# Altium PCB HHO_DRIVE_V1.PcbDoc
Units mm, origin at the board's own origin, x right, y up, seen from the top; angles counter-clockwise.
Board outline 109.5 x 99 mm, 2 copper layers (Top Layer, Bottom Layer); 45 components, 38 nets, 156 pads, 12 vias.
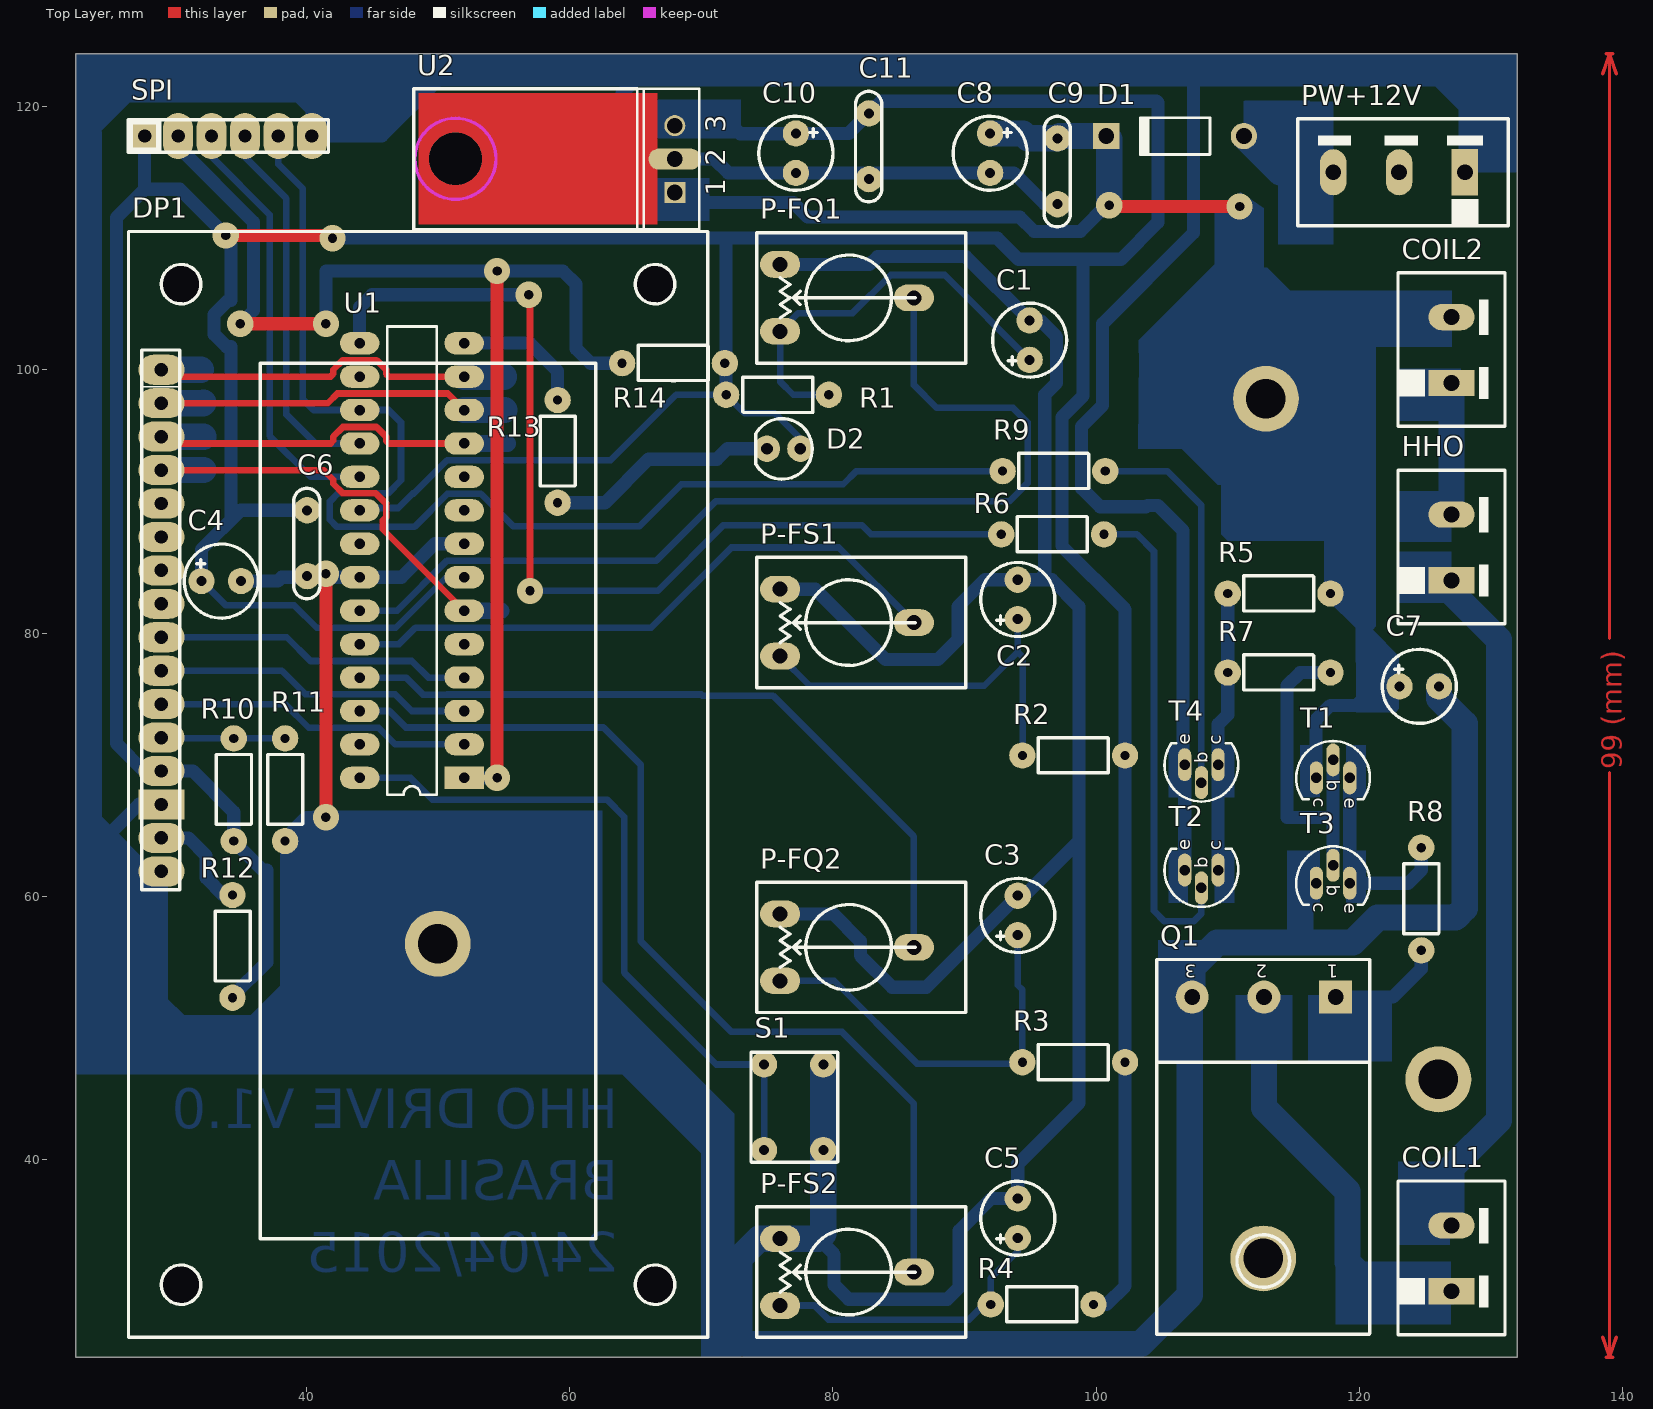
[diagram p0: Top Layer view]
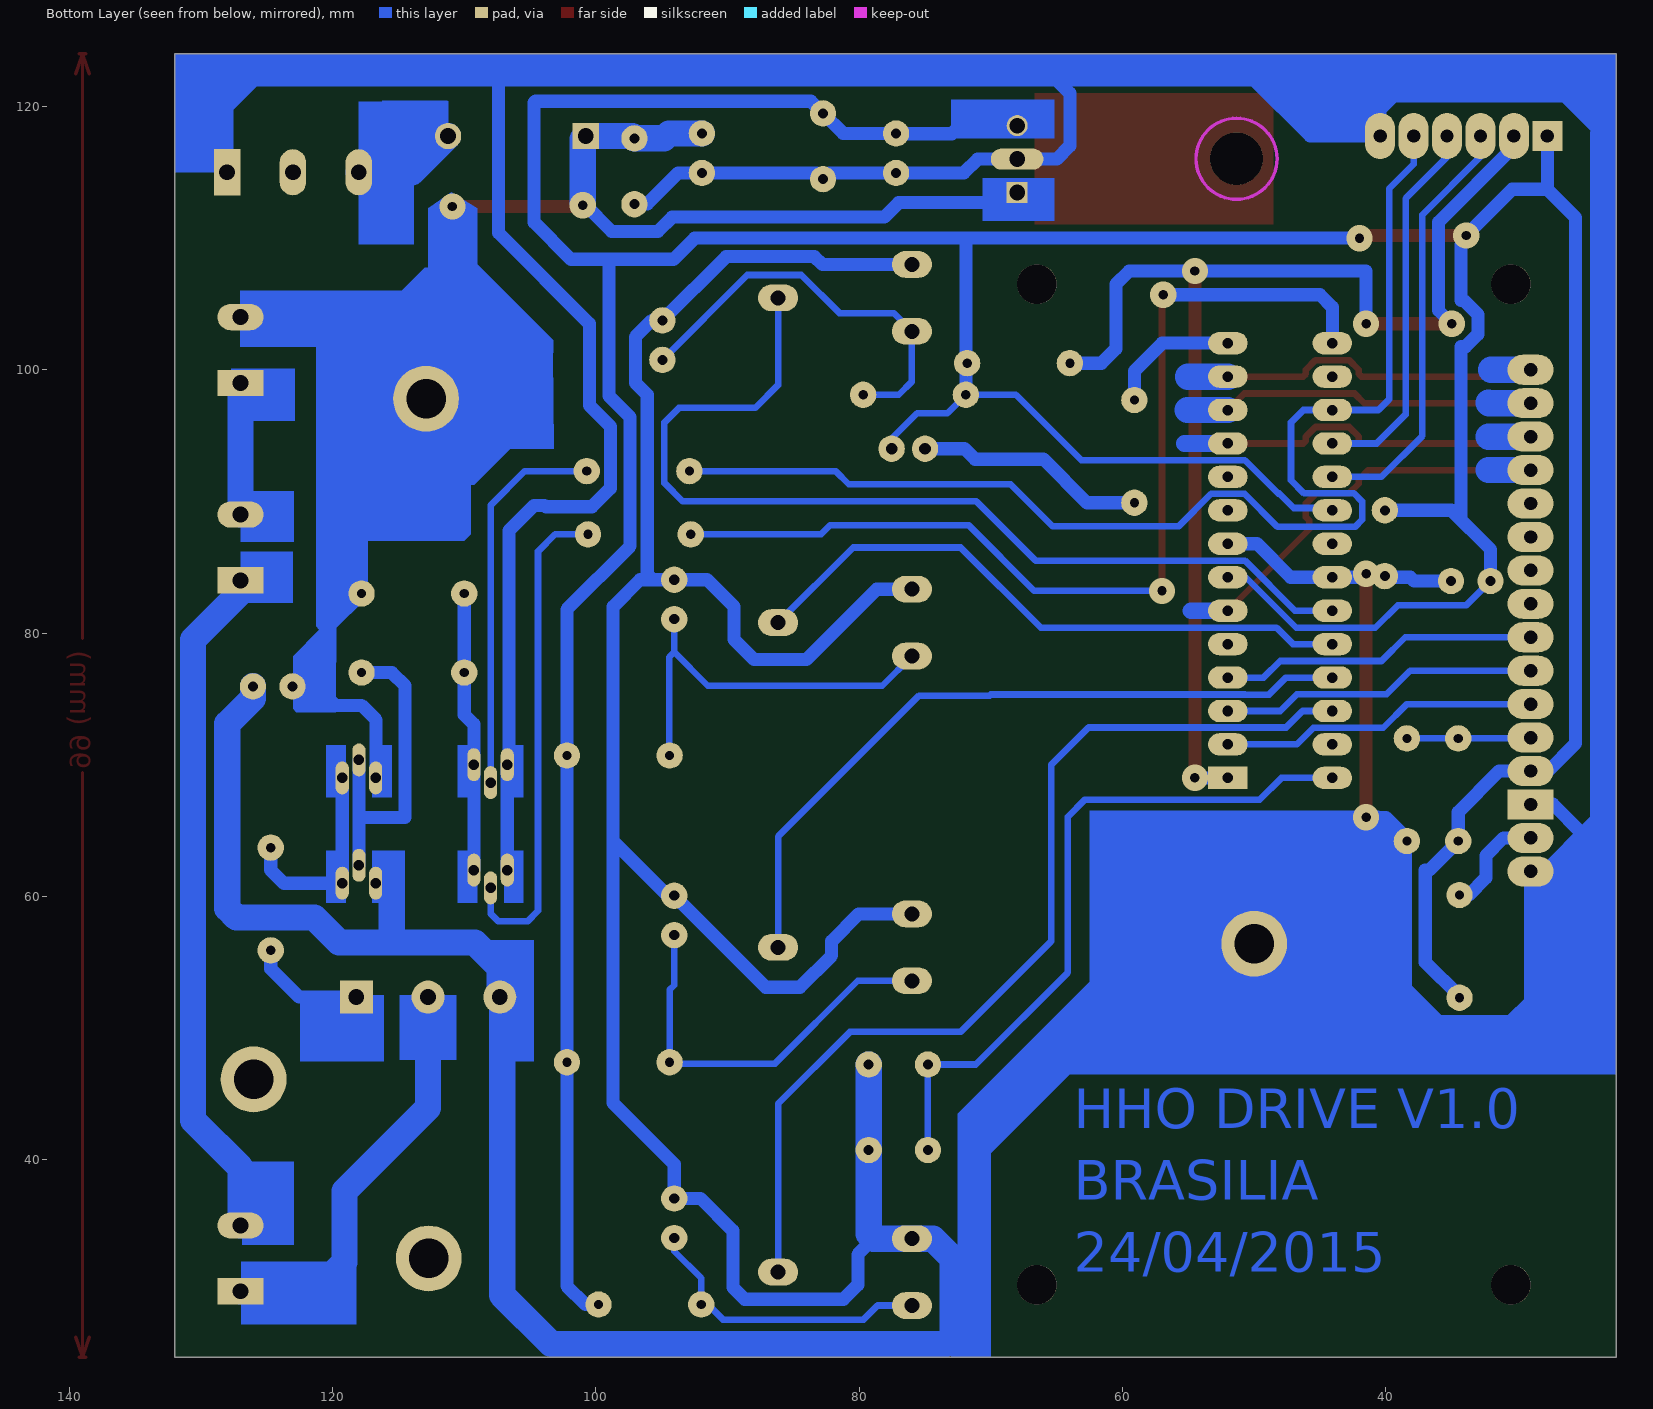
[diagram p1: Bottom Layer view, seen from below]
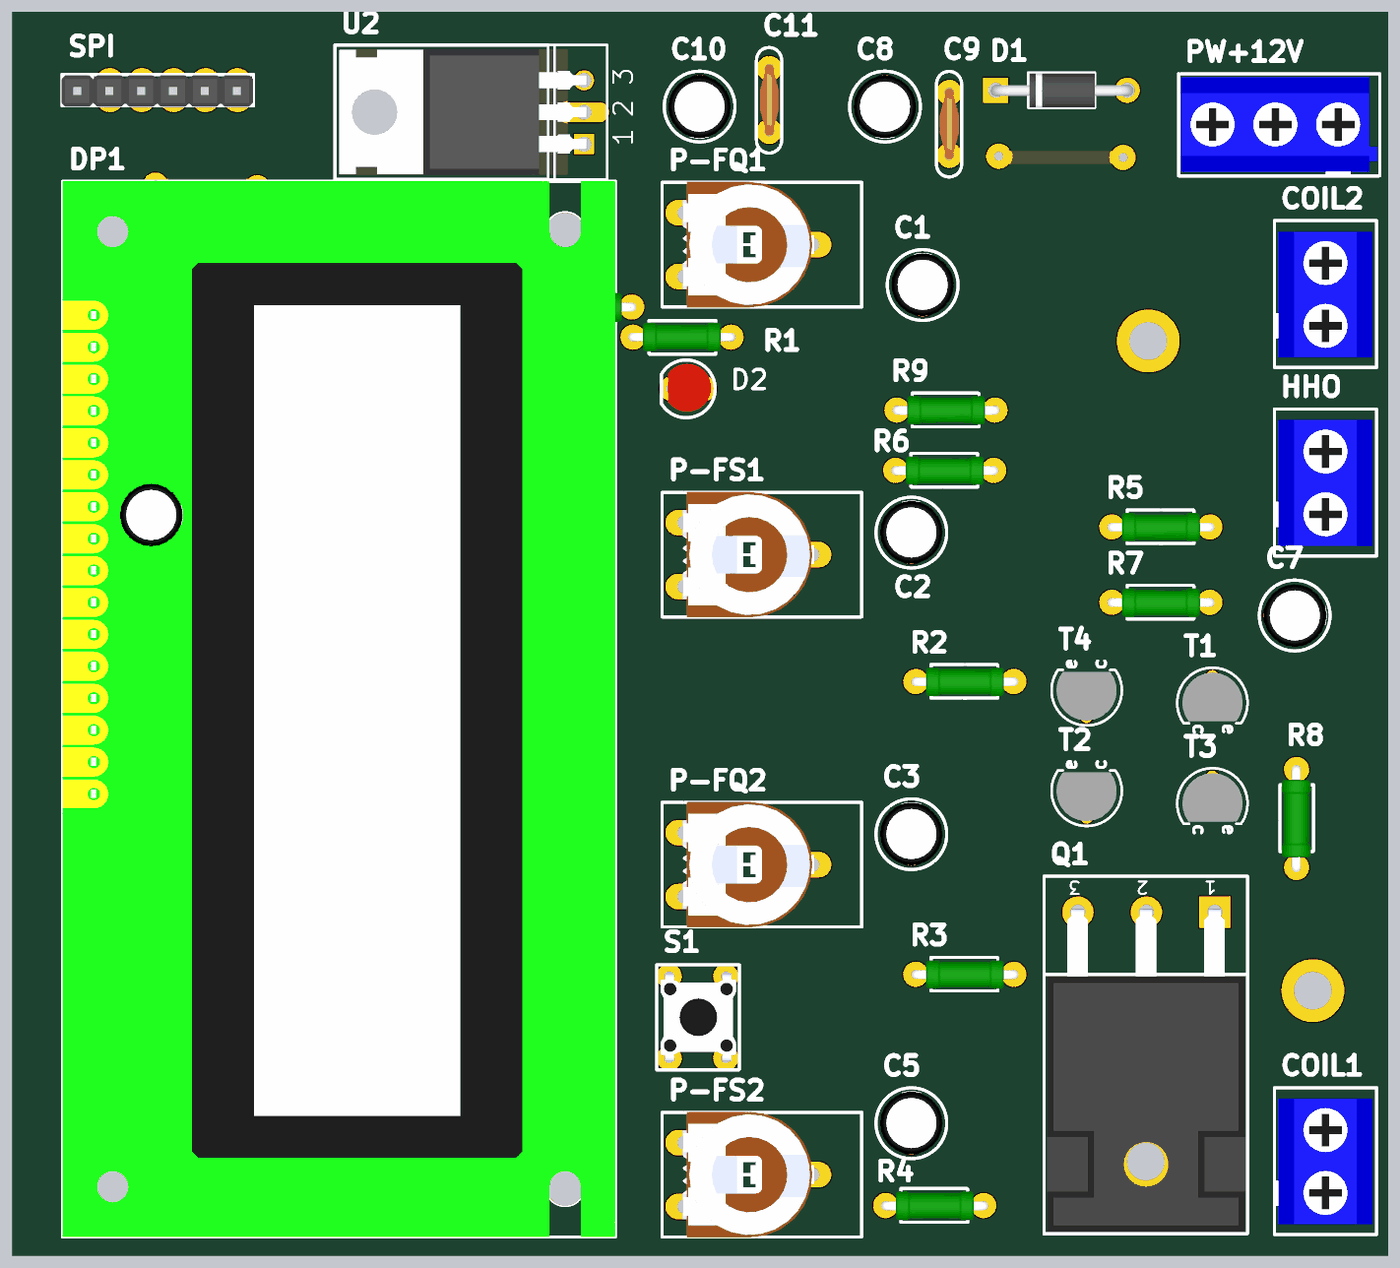
[diagram p2: 3D render of the assembled board from above, using the file's embedded part models]

## Layer stack, top to bottom
Top Solder: solder mask 0.0102, Solder Resist, Dk 3.5
Top Layer: signal copper 0.0356
Dielectric 1: dielectric 0.32, FR-4, Dk 4.8
Bottom Layer: signal copper 0.0356
Bottom Solder: solder mask 0.0102, Solder Resist, Dk 3.5

## Board outline
22.5,25 22.5,124 132,124 132,25

## Design rules (kind name [scope] priority, off if disabled: settings)
Clearance [All] p1: gap=0.254
PolygonConnect [All] p1: connectstyle=Relief reliefconductorwidth=0.254 reliefentries=4 polygonreliefangle="90 Angle" airgapwidth=0.254
RoomDefinition HHO_DRIVE_V1 [InComponentClass('HHO_DRIVE_V1')] p1: confinementstyle=ConfineIn formatcopy=TRUE lockcomponents=FALSE outline 19.75,25.5 21.75,25.5 21.75,123.5 19.75,123.5
RoutingVias [All] p1: holewidth=0.711 width=1.27 viastyle="Through Hole" minholewidth=0.711 minwidth=1.27 maxholewidth=0.711 maxwidth=1.27
SolderMaskExpansion [All] p1: expansion=0.102
UnpouredPolygon [All] p1: allowunpoured=FALSE
Width Width_POWER [(InNet('+12V') AND InNet('VCC') AND InNet('GND'))] p1: maxlimit=2 minlimit=0.25 preferedwidth=0.5
Width [All] p2: maxlimit=2 minlimit=0.25 preferedwidth=0.5
29 further rules are at their usual default settings.

## Components (designator, comment, footprint, x,y, rotation, side; value= is the part's Value field where it differs from the comment)
C1 "Cap. Elet." "CAP ELE RAD 11mm H" 96.9,102.7 r90 top
C2 "Cap. Elet." "CAP ELE RAD 11mm H" 96,83 r90 top
C3 "Cap. Elet." "CAP ELE RAD 11mm H" 96,59 r90 top
C4 "Cap. Elet." "CAP ELE RAD 11mm H" 34,82 r0 top
C5 "Cap. Elet." "CAP ELE RAD 11mm H" 96,36 r90 top
C6 "Disco" "CAP CER DISK 5MM" 40,84 r90 top
C7 "Cap. Elet." "CAP ELE RAD 11mm H" 125,74 r0 top
C8 "Cap. Elet." "CAP ELE RAD 11mm H" 90,116 r270 top
C9 "Disco" "CAP CER DISK 5MM" 97,112.25 r90 top
C10 "Cap. Elet." "CAP ELE RAD 11mm H" 75.25,116 r270 top
C11 "Disco" "CAP CER DISK 5MM" 82.675,114.15 r90 top
COIL1 "Male Connector 2 pins" BR102A 127,30 r180 top
COIL2 "Male Connector 2 pins" BR102A 127,99 r180 top
D1 "1N4001" DO-41 106,117.75 r180 top
D2 "LED-CPU" "LED Red 3mm" 75,94 r0 top
DP1 "DIPS 44780 16X02" "Display 44780 16x02 com conector" 29,100 r0 top
HHO "Male Connector 2 pins" BR102A 127,84 r180 top
P-FQ1 "POT" "POT 200MIL/400MIL" 76,108 r270 top
P-FQ2 "POT" "POT 200MIL/400MIL" 76,58.667 r270 top
P-FS1 "POT" "POT 200MIL/400MIL" 76,83.333 r270 top
P-FS2 "POT" "POT 200MIL/400MIL" 76,34 r270 top
PW+12V "Male Connector 3 pins" BR103A 128.016,115 r270 top
Q1 "T-HEXFET N" "TO218 - DEITADO" 115,52 r180 top
R1 "Resistor Generic" "RES 300 CR25" 79.7,98.1 r180 top
R2 "Resistor Generic" "RES 300 CR25" 94.4,70.7 r0 top
R3 "Resistor Generic" "RES 300 CR25" 94.4,47.4 r0 top
R4 "Resistor Generic" "RES 300 CR25" 92,29 r0 top
R5 "Resistor Generic" "RES 300 CR25" 110,83 r0 top
R6 "Resistor Generic" "RES 300 CR25" 92.8,87.5 r0 top
R7 "Resistor Generic" "RES 300 CR25" 110,77 r0 top
R8 "Resistor Generic" "RES 300 CR25" 124.7,63.7 r270 top
R9 "Resistor Generic" "RES 300 CR25" 92.9,92.3 r0 top
R10 "Resistor Generic" "RES 300 CR25" 34.5,72 r270 top
R11 "Resistor Generic" "RES 300 CR25" 38.4,72 r270 top
R12 "Resistor Generic" "RES 300 CR25" 34.4,60.1 r270 top
R13 "Resistor Generic" "RES 300 CR25" 59.1,97.7 r270 top
R14 "Resistor Generic" "RES 300 CR25" 64,100.5 r0 top
S1 "SW-PBST 4 Pins" "SW-PBST 4 Pins - SKHH 17 mm" 76.35,44.45 r0 top
SPI "BAR 6 PINS" "HEADER BAR 6 PINS" 29,119 r0 top
T1 "Transistor" "TO-92 - Large" 118,69 r270 top
T2 "Transistor" "TO-92 - Large" 108,62 r90 top
T3 "Transistor" "TO-92 - Large" 118,61 r270 top
T4 "Transistor" "TO-92 - Large" 108,70 r90 top
U1 "ATmega8-16PC" 28P3 52,69 r180 top
U2 "µA78M05CKC" "KC03 - Deitado" 68,116 r90 top

## Footprints (in the part's own frame and the unit in brackets; to place one, negate y for a bottom-side part, rotate by r counter-clockwise, add the part's x,y. Pads: shape width x height; smd on the part's side, far side on the other; paste and mask are expansions set on the pad)
28P3 [mm] "Atmel DIP 28"
  rect 3x1.7 hole 0.8: 1(0,0)
  oval 3x1.7 hole 0.8: 2(0,-2.54) 3(0,-5.08) 4(0,-7.62) 5(0,-10.16) 6(0,-12.7) 7(0,-15.24) 8(0,-17.78) 9(0,-20.32) 10(0,-22.86) 11(0,-25.4) 12(0,-27.94) 13(0,-30.48) 14(0,-33.02) 15(7.938,-33.02) 16(7.938,-30.48) 17(7.938,-27.94) 18(7.938,-25.4) 19(7.938,-22.86) 20(7.938,-20.32) 21(7.938,-17.78) 22(7.938,-15.24) 23(7.938,-12.7) 24(7.938,-10.16) 25(7.938,-7.62) 26(7.938,-5.08) 27(7.938,-2.54) 28(7.938,0)
  silkscreen extent 2.08,-34.29 5.85,1.27, body extent -0.48,-34.4 8.43,1.1, height 3.2
BR102A [mm] "MetalTex Borne 2 vias passo 5mm"
  rect 3.5x2 hole 1.2: 1(0,0)
  oval 3.5x2 hole 1.2: 2(0,-5)
  silkscreen extent -4.06,-8.37 4.06,3.3, body extent -3.75,-7.5 3.75,2.5, height 10.01
BR103A [mm] "MetalTex Borne 3 vias passo 5mm"
  rect 3.5x2 hole 1.2: 1(0,0)
  oval 3.5x2 hole 1.2: 2(0,-5) 3(0,-10)
  silkscreen extent -4.06,-12.7 4.06,3.3, body extent -3.78,-12.5 3.72,3.1, height 10.01
"CAP CER DISK 5MM" [mm] "CAP CER DISK 5MM"
  round 2 hole 0.762: 1(0.325,-0.075) 2(5.325,-0.075)
  silkscreen extent -1.4,-1.05 7,0.95, body extent -0.01,-0.82 5.67,0.67, height 6.24
"CAP ELE RAD 11mm H" [mm] "Cap Eletrolitic Radial 11mm Height"
  round 2 hole 0.762: 1(-1.95,1.95) 2(1.05,1.95)
  silkscreen extent -3.26,-0.86 2.36,4.76, body extent -2.94,-0.55 2.1,4.45, height 11.03
"Display 44780 16x02 com conector" [mil] "Display 44780 16x02 com conector"
  rect 137.8x90 hole 40: 1(0,-1300)
  oval 137.8x90 hole 40: 2(0,-1200) 3(0,-1100) 4(0,-1000) 5(0,-900) 6(0,-800) 7(0,-700) 8(0,-600) 9(0,-500) 10(0,-400) 11(0,-300) 12(0,-200) 13(0,-100) 14(0,0) 15(0,-1400) 16(0,-1500)
  silkscreen extent -98,-2894 1634,413, body extent -98,-2894 1634,413, height 737
DO-41 [mm] "Diode, Axial; Body 5.2 x 2.7 mm (LxDia. max), Lead Dia. 0.86 mm (max)"
  round 2 hole 1.2: 1(-5.23,0)
  rect 2x2 hole 1.2: 2(5.23,0)
  silkscreen extent -2.65,-1.4 2.75,1.4, body extent -5.7,-1.36 5.62,1.4, height 2.74
"HEADER BAR 6 PINS" [mil] ".100 Inch AMPMODU Header 6 Pins"
  rect 90x90 hole 40: 1(-50,-48.82)
  oval 90x137.8 hole 40: 2(50,-48.82) 3(150,-48.82) 4(250,-48.82) 5(350,-48.82) 6(450,-48.82)
  silkscreen extent -100,-98 500,0, body extent -102,-101 498,-2, height 328
"KC03 - Deitado" [mm] "TO, Thru-Hole, Vertical, Heatsink Mounted; 3 In-Line Leads; Pitch 2.54 mm"
  rect 1.6x1.6 hole 1.2: 1(-2.54,0)
  oval 1.6x4 hole 1.2: 2(0,0)
  round 1.6 hole 1.2: 3(2.54,0)
  round 4 hole 4: ""(0.025,16.662)
  Top Layer region: -4.978,1.295 5.004,1.295 5.004,19.482 -4.978,19.482
  Keep-Out Layer circle w0.254: c0.025,16.662 r3.08
  silkscreen extent -5.36,-1.85 5.35,19.84, body extent -4.99,-0.25 5.01,19.47, height 4.5
"LED Red 3mm" [mm] "LED Red 3mm"
  round 2 hole 0.889: A(2.54,0) K(0,0)
  silkscreen extent -0.85,-2.31 3.44,2.29, body extent -0.33,-1.83 3.13,1.98, height 5.2
"POT 200MIL/400MIL" [mil] "Pot 200Mil/400Mil"
  oval 80x120 hole 45: 1(0,0) 2(100,400) 3(200,0)
  silkscreen extent -95,-70 295,555, body extent -97,-5 297,407, height 226
"RES 300 CR25" [mm] "Resistor CR25 300Mil height 2.4"
  round 2 hole 0.7: 1(0,0) 2(7.8,0)
  silkscreen extent 1.22,-1.35 6.53,1.35, body extent -0.34,-1.17 8.16,1.13, height 2.29
"SW-PBST 4 Pins - SKHH 17 mm" [mm] "Tactile switch SKHH 17mm"
  round 2 hole 0.762: 1(2.93,2.78) 2(2.93,-3.72) 3(-1.57,2.78) 4(-1.57,-3.72)
  silkscreen extent -2.56,-4.66 4.02,3.7, body extent -2.25,-4.45 3.75,3.51, height 13
"TO218 - DEITADO" [mm] "TO, Thru-Hole, Horizontal, Heatsink Mounted; 3 In-Line Leads; Pitch 5.45 mm"
  rect 2.5x2.5 hole 1.2: 1(-3.2,-0.35)
  round 2.5 hole 1.2: 2(2.25,-0.35) 3(7.7,-0.35)
  silkscreen extent -5.8,-3.2 10.4,25.25, body extent -5.6,-0.6 10.15,25.12, height 4.73
"TO-92 - Large" [mm] "TO, Flat Index; 3 In-Line, Axial Leads; Body Dia. 4.6mm; Leads 0.41 x 0.39 mm (max)"
  oval 2.5x1 hole 0.8: 1(0,1.27) 2(-1.36,0) 3(0,-1.27)
  silkscreen extent -2.8,-2.8 1.63,2.8, body extent -2.41,-2.39 1.46,2.41, height 2.76

## Part data
C1 C2 C3 C4 C5 C7 C8 C10: library part CAP_RADIAL_ELETROLITICO, "Capacitor Radial Eletrolitico"
C6 C9 C11: library part CAP_DISCO, "SMD Capacitor 1210 size"
COIL1 COIL2 HHO: library part "Male Con 2 Pin"
D1: library part "Diode 1N4001", "1 Amp General Purpose Rectifier"
D2: library part LED, "LED"
DP1: library part "Display 44780 16x02 com conector 16 pinos", "Display 44780 16x02 com conector 16 pinos"
P-FQ1 P-FQ2 P-FS1 P-FS2: "Potenciometer 3 pins"
PW+12V: library part "Male Con 3 Pin"
Q1: "HEXFET Power MOSFET"
R1 R2 R3 R4 R5 R6 R7 R8 R9 R10 R11 R12 R13 R14: "Generic Resistor"
S1: library part "SW-PBST 4 Pins SKHH"
SPI: library part "HEADER BAR  6 PINS", ".100 Inch AMPMODU Headers 1-826629-0 (Tyco)"
T1 T2 T4: library part T-NPN, "General Bipolar Transistor NPN"
T3: library part T-PNP, "General Bipolar Transistor NPN"
U1: "8-Bit AVR Microcontroller with 8K Bytes of In-System Programmable Flash Memory"
U2: "Positive-Voltage Regulator"

## Free pads (board coordinates)
  round 3 hole 3: ""(30.5,30.5) ""(30.5,106.5) ""(66.5,30.5) ""(66.5,106.5)
  round 5 hole 3: ""(50,56.4) ""(112.7,32.5) ""(112.9,97.8) ""(126,46.1)

## Via types
v1: diameter 2, hole 0.711, Top Layer to Bottom Layer, 12 vias

## Nets (pads, with @x,y where several pads share a name; then routed paths per layer and width w, separated by ;. In a path a pad name is that pad's centre, name@x,y a point inside that pad or via, vN(x,y) a via of type N, cw(c..) or ccw(c..) an arc to the next point about the centre after c; other vN are vias at no path point)
+12V: C7.1 C8.1 C9.2 COIL2.2 D1.2 pad.@112.9,97.8 R5.2 T1.3 U2.1 | length 122.5
  Top Layer w1: v1@100.9,112.4 v1(110.9,112.4)
  Bottom Layer w1: U2.1 69.24,113.46 70,112.7 77,112.7 78.1,111.6 94.2,111.6 95.3,110.5 98.8,110.5 v1@100.9,112.6 ; 94.45,117.95 94.825,117.575 ; C9.2 C9.2@97.25,117.75 ; D1.2 D1.2@101,117.52 ; v1(110.9,112.4) 110.9,107.4 114.3,104 117.8,104 ; T1.3 116.7,69.03 116.7,73.4 117.8,74.5 119.8,74.5 121.7,76.4 ; C7.1@122.6,76.4 121.7,76.4 ; COIL2.2 117.8,104 ; 117.8,104 R5.2 120.2,80.6 120.2,77.9 121.7,76.4
  Bottom Layer w2: C8.1 94.45,117.95 ; 94.825,117.575 C9.2 ; C9.2@97.25,117.75 D1.2 ; v1@101,112.7 D1.2@101,117.52
  other v1: 101,112.5
CPU-LED: R13.1 U1.14 | length 10
  Bottom Layer w1: U1.14 56.98,102.02 59,100 ; R13.1 59.1,99.9
D-D4: DP1.11 U1.6 | length 35.1
  Top Layer w0.5: DP1.11 41.32,92.38 42.059,91.641 42.059,91.341 42.793,90.606 45.3,90.606 46.066,89.839 46.066,88.801 45.816,88.551 45.816,87.884 U1.6
  Bottom Layer w1.27: U1.6 54.8,81.7
  Bottom Layer w2: DP1.11 32.18,92.38
D-D5: DP1.12 U1.11 | length 31.1
  Top Layer w0.5: DP1.12 29.52,94.4 41.851,94.4 42.059,94.607 42.059,94.919 42.793,95.654 45.332,95.654 46.066,94.919 46.066,94.607 46.274,94.4 U1.11
  Bottom Layer w1.27: U1.11 55.3,94.4
  Bottom Layer w2: DP1.12 32.18,94.92
D-D6: DP1.13 U1.12 | length 30.1
  Top Layer w0.5: DP1.13 41.635,97.46 42.369,98.194 50.746,98.194 U1.12
  Bottom Layer w2: DP1.13 32.16,97.46 32.2,97.5 ; U1.12 55.06,96.94
D-D7: DP1.14 U1.13 | length 30.6
  Top Layer w0.5: DP1.14 29.52,99.48 41.851,99.48 42.059,99.687 42.059,99.999 42.793,100.734 45.332,100.734 46.066,99.999 46.066,99.687 46.274,99.48 U1.13
  Bottom Layer w2: DP1.14 32,100 ; U1.13 55.02,99.48
D-E: DP1.6 U1.4 | length 24.3
  Bottom Layer w0.5: DP1.6 38.52,79.68 40.325,77.875 48.025,77.875 49.28,76.62 U1.4
D-RS: DP1.4 U1.2 | length 24.3
  Bottom Layer w0.5: DP1.4 38.4,74.6 40.2,72.8 42.787,72.8 42.793,72.794 45.506,72.794 46.76,71.54 U1.2
D-RW: DP1.5 U1.3 | length 24.3
  Bottom Layer w0.5: DP1.5 38.16,77.14 39.95,75.35 46.75,75.35 48.02,74.08 U1.3
FQ1: P-FQ1.2 U1.23 | length 75.8
  Bottom Layer w0.5: U1.23 46.9,81.7 50.7,85.5 66.6,85.5 71.1,90 93.4,90 94.8,91.4 94.8,96 93.7,97.1 87.9,97.1 86.16,98.84 P-FQ1.2
FQ2: P-FQ2.2 U1.25 | length 55.5
  Bottom Layer w0.5: U1.25 47.58,76.62 48.875,75.325 50.722,75.325 50.731,75.334 70,75.334 70.088,75.246 75.454,75.246 86.16,64.54 P-FQ2.2
FS1: P-FS1.2 U1.24 | length 47.5
  Bottom Layer w0.5: U1.24 47.06,79.16 48.314,80.414 53.269,80.414 53.283,80.4 66.2,80.4 72.3,86.5 80.453,86.5 P-FS1.2
FS2: P-FS2.2 U1.26 | length 75.1
  Bottom Layer w0.5: U1.26 46.32,74.08 47.574,72.826 53.269,72.826 53.27,72.825 62.575,72.825 65.425,69.975 65.425,56.575 72.3,49.7 80.7,49.7 86.16,44.24 P-FS2.2
GND: C1.2 C2.2 C3.2 C4.2 C5.2 C6.1 C7.2 C8.2 C9.1 C10.2 C11.1 DP1.1 DP1.16 P-FQ1.1 P-FQ2.1 P-FS1.1 P-FS2.1 pad.@50,56.4 PW+12V.1 Q1.3 R11.2 S1.1 S1.2 SPI.6 T2.1 T3.3 T4.1 U1.8 U1.22 U2.2 | length 666.6
  Top Layer w1: v1(41.5,66) v1(41.5,84.5)
  Bottom Layer w1: 23.5,66.2 25.1,64.6 ; 23.5,117.9 26.4,120.8 39.4,120.8 40.43,119.77 SPI.6 45.76,117.76 50,122 65,122 ; DP1.1 28.98,67 27.3,67 25.1,64.8 25.1,64.6 ; C4.2 37.85,83.95 38.14,84.24 U1.22 47.24,84.24 49.78,86.78 U1.8 ; v1(41.5,66) 40,66 38.5,64.5 38.5,53 36,50.5 30.5,50.5 29,52 DP1.16 27.7,61.9 26.3,63.3 26.3,63.4 25.1,64.6 ; P-FQ2.1 80.033,58.667 82.1,56.6 82.1,55.5 84.5,53.1 87.1,53.1 C3.2 94.55,60.05 98.7,64.2 ; P-FS1.1 78.667,83.333 84,78 88,78 89.5,79.5 89.5,82 91.55,84.05 C2.2 96.65,84.05 98.7,82 98.7,64.2 ; P-FQ1.1 82.8,108 83.4,108.6 90.1,108.6 C1.2 95.75,103.75 97,102.5 97,99 96.1,98.1 96.1,84.45 95.7,84.05 ; 79.28,34.38 78.9,34 80.1,32.8 80.1,30.5 81.2,29.4 88.7,29.4 89.6,30.3 89.6,34.6 92.05,37.05 C5.2 94.05,39.65 98.7,44.3 98.7,64.2 ; C9.1 97.05,112.6 96.1,112.6 93.75,114.95 C8.2 83.225,114.95 C11.1 82.275,114.95 C10.2 72.05,114.95 71,116 U2.2 65,116 64,117 64,121 65,122 ; T2.1 T4.1 106.6,70.13 106.6,87.8 104.7,89.7 103.9,89.7 103.8,89.6 100.3,89.6 98.9,91 98.9,95.7 100.5,97.3 100.5,103.5 107.4,110.4 107.4,122 ; Q1.3@107.125,52.175 Q1.3 ; PW+12V.1 128.016,119.984 126,122 107.4,122 ; 65,122 107.4,122
  Bottom Layer w2: 23.5,66.2 23.5,117.9 ; 78.9,34 P-FS2.1 74.4,34 72.9,32.5 72.9,26.5 73.4,26 103.4,26 107.125,29.725 Q1.3@107.125,52.175 ; 79.28,34.38 S1.2 S1.1 ; Q1.3 107.3,54.6 109.2,56.5 115.5,56.5 ; 115.5,59.5 115.5,56.5 ; C7.2 126.05,75.05 128,73.1 128,59.1 127.3,58.4 121.4,58.4 119.5,56.5 115.5,56.5
KEY1: S1.3 S1.4 U1.28 | length 53.2
  Bottom Layer w0.5: U1.28 47.925,69 49.575,67.35 62.85,67.35 64.15,66.05 64.15,54.225 71.145,47.23 S1.3 S1.4
MISO: SPI.4 U1.18 | length 28.9
  Bottom Layer w0.5: SPI.4 35.35,116.15 38.5,113 38.5,96.6 40.7,94.4 U1.18
NetC1_1: C1.1 P-FQ1.3 R1.1 | length 31.3
  Bottom Layer w0.5: R1.1 77,98.1 76,99.1 P-FQ1.3 77.384,104.304 81.504,104.304 84.4,107.2 88.5,107.2 C1.1
NetC2_1: C2.1 P-FS1.3 R2.1 | length 30.7
  Bottom Layer w0.5: P-FS1.3 78.253,76 91.5,76 94.05,78.55 ; C2.1 94.05,78.55 ; R2.1@94.8,70.7 94.425,71.075 94.425,78.175 94.05,78.55
NetC3_1: C3.1 P-FQ2.3 R3.1 | length 30.8
  Bottom Layer w0.5: P-FQ2.3 80.113,53.587 86.4,47.3 94.3,47.3 R3.1 94.4,52.9 94.05,53.25 C3.1
NetC5_1: C5.1 P-FS2.3 R4.1 | length 22.5
  Bottom Layer w0.5: P-FS2.3 78.605,28.92 79.675,27.85 90.35,27.85 92,29.5 92,31 94.05,33.05 C5.1
NetCOIL1_1: COIL1.1 Q1.2 | length 31.6
  Bottom Layer w2: Q1.2 112.75,43.95 119.1,37.6 119.1,32.2 121.3,30 COIL1.1
NetCOIL1_2: COIL1.2 HHO.1 | length 52
  Bottom Layer w1: HHO.1@127,83.1 HHO.1
  Bottom Layer w2: COIL1.2 127,39.4 130.6,43 130.6,79.5 HHO.1@127,83.1
NetCOIL2_1: COIL2.1 HHO.2 | length 10
  Bottom Layer w2: HHO.2 COIL2.1
NetD1_1: D1.1 PW+12V.3 | length 7.9
  Bottom Layer w2: D1.1 113.98,115 PW+12V.3
NetD2_K: D2.K R13.2 | length 17.6
  Bottom Layer w1: R13.2 62.7,89.9 66,93.2 71.2,93.2 72,94 D2.K
NetDP1_15: DP1.15 R12.1 | length 8.2
  Bottom Layer w1: DP1.15 31.06,64.44 32.4,63.1 32.4,61.4 33.7,60.1 R12.1
NetQ1_1: Q1.1 R8.2 | length 8.8
  Bottom Layer w1: Q1.1 122.55,52.35 124.7,54.5 R8.2
NetR5_1: R5.1 R7.1 T2.3 T4.3 | length 21.3
  Bottom Layer w1: T2.3 T4.3 109.27,73.07 110,73.8 R7.1 R5.1
NetR6_2: R6.2 T2.2 | length 37.8
  Bottom Layer w0.5: R6.2 103.1,87.5 104.4,86.2 104.4,58.9 105.2,58.1 107.4,58.1 108,58.7 T2.2
NetR7_2: R7.2 T1.2 T3.2 | length 25.2
  Bottom Layer w1: R7.2 115.5,77 114.5,76 114.5,66 118,66 ; T3.2 118,66 ; T1.2 118,66
NetR8_1: R8.1 T1.1 T3.1 | length 15.5
  Bottom Layer w1: T1.1 T3.1 123.7,61 124.7,62 R8.1
NetR9_2: R9.2 T4.2 | length 29.4
  Bottom Layer w0.5: R9.2 105.4,92.3 108,89.7 T4.2
OC1A: R6.1 U1.15 | length 76.7
  Top Layer w0.5: v1(56.9,105.7) 57,105.6 v1(57,83.2)
  Bottom Layer w0.5: v1(57,83.2) 66.7,83.2 71.7,88.2 82.2,88.2 82.9,87.5 R6.1
  Bottom Layer w1: U1.15 44.063,104.763 45,105.7 v1(56.9,105.7)
OC2/MOSI: R9.1 SPI.5 U1.17 | length 96.2
  Bottom Layer w0.5: SPI.5@37.679,117.76 SPI.5 37.89,115.61 39.75,113.75 39.75,97.75 40.56,96.94 U1.17 46.26,96.94 47.2,96 47.2,91.6 46.206,90.606 42.793,90.606 42.774,90.625 42.425,90.625 41.8,90 41.8,88.6 42.334,88.066 48.223,88.066 50.731,90.574 53.269,90.574 55.743,88.1 65.3,88.1 68.5,91.3 80.8,91.3 81.8,92.3 R9.1
RESET: R14.1 SPI.2 U1.1 | length 96.8
  Top Layer w1: v1(35,103.5) v1(41.5,103.5) ; v1(54.5,69) v1(54.5,107.5)
  Bottom Layer w1: SPI.2 30.27,116.93 36,111.2 36,104.5 v1(35,103.5) ; v1(41.5,103.5) 41.5,107.5 v1(54.5,107.5) 59.5,107.5 60.5,106.5 60.5,101.6 61.6,100.5 R14.1 ; U1.1 v1(54.5,69)
SCK: SPI.3 U1.19 | length 32.7
  Bottom Layer w0.5: SPI.3 32.81,116.19 37.225,111.775 37.225,94.975 40.34,91.86 U1.19
VCC: C4.1 C6.2 C10.1 C11.2 D2.A DP1.2 R1.2 R2.2 R3.2 R4.2 R10.2 R12.2 R14.2 SPI.1 U1.7 U1.20 U2.3 | length 394.1
  Top Layer w1: v1(33.9,110.2) 41.8,110.2 v1(42,110)
  Bottom Layer w0.5: C4.1 33.9,82.1 39.1,82.1 40.8,80.4 42.779,80.4 42.793,80.414 45.332,80.414 45.346,80.4 46.8,80.4 50.64,84.24 U1.7 ; U1.20 44.242,89.5 47,89.5 48.1,90.6 48.175,90.6 50.7,93.125 63.125,93.125 68.1,98.1 R1.2 73.3,96.7 75.6,96.7 77.54,94.76 D2.A
  Bottom Layer w1: SPI.1 27.73,113.705 ; 31.38,69.52 DP1.2 27.68,69.52 25.6,71.6 25.6,111.575 27.73,113.705 ; 31.45,69.45 34.5,66.4 R10.2 36.7,62 37,62 37,55 34.4,52.4 R12.2 ; C4.1 32.05,86.35 35.025,89.325 C6.2 ; v1@33.9,110.5 v1(33.9,110.2) 30.395,113.705 27.73,113.705 ; 34.3,88.6 34.3,101.746 33.954,101.746 33,102.7 33,104.2 34.054,105.254 34.3,105.254 v1@34.3,109.5 ; v1(42,110) 71.9,110 ; U2.3 72.36,118.54 72.975,117.925 77.175,117.925 C10.1 81.225,117.95 C11.2 83.675,120.4 104.6,120.4 104.7,120.3 104.7,111.2 101.9,108.4 99,108.4 ; R1.2 71.9,103 71.9,110 ; R4.2 100.8,29 102.2,30.4 R3.2 102.2,70.3 R2.2@102.6,70.7 ; R2.2 102.2,81.8 97.4,86.6 97.4,96.4 99,98 99,108.4 ; 71.9,110 92.5,110 94.1,108.4 99,108.4
VD: DP1.3 R10.1 R11.1 | length 9.3
  Bottom Layer w0.5: DP1.3@29.06,72 R10.1 R11.1
pads on no net: DP1.7 DP1.8 DP1.9 DP1.10 PW+12V.2 U1.5 U1.9 U1.10 U1.16 U1.21 U1.27 U2.
copper on no net: | length 96.2
  Top Layer w0.254: 138.492,26.524 139,25 ; 138.492,122.476 139,124 ; 138.746,25 139.254,25 ; 138.746,124 139.254,124 ; 139,69.396 139,25 ; 139,79.604 139,124 ; 139.508,26.524 139,25 ; 139.508,122.476 139,124

## Other copper
Top Layer:
  text "99 (mm)" at 139.914,69.65 h1.52 r90
Bottom Layer:
  rectangle net NetCOIL2_1: 122.875,96.125 127.725,100.1
  rectangle net NetCOIL2_1: 122.925,86.925 127,90.775
  rectangle net NetCOIL1_2: 123.025,82.275 127,86.2
  rectangle net NetCOIL1_2: 122.925,33.525 126.9,39.85
  rectangle net NetCOIL1_1: 118.2,27.475 126.975,32.275
  rectangle net +12V: 65.15,111.3 70.65,114.55
  rectangle net VCC: 65.15,117.575 73.025,120.525
  rectangle net NetQ1_1: 116.1,47.45 122.475,52.5
  rectangle net NetCOIL1_1: 110.575,47.575 114.925,52.5
  rectangle net GND: 104.7,47.45 108,56.675
  rectangle net NetD1_1: 113.825,109.525 118.016,120.375
  rectangle net NetR5_1: 109.5,67.5 110.5,71.5
  rectangle net GND: 105.5,67.5 106.73,71.5
  rectangle net GND: 105.5,59.5 107,63.5
  rectangle net NetR5_1: 109,59.5 110.5,63.5
  rectangle net GND: 114.5,59.5 117,63.5
  rectangle net NetR8_1: 119,59.5 120.5,63.5
  rectangle net +12V: 115.5,67.5 117,71.5
  rectangle net NetR8_1: 119,67.5 120.5,71.5
  region net NetD1_1: 111.23,117.75 111.23,120.38 111.275,120.425 116.225,120.425 116.225,115.45 114.9,114.125
  region net +12V: 127,101.75 121.25,101.75 121.25,80.5 121,80.25 123,78.25 123,74.25 122.75,74 119.75,74 119.75,74.25 119.5,74.5 119.75,74.75 119.75,81.05 117.5,83.3 117.5,87 110,87 109.5,87.5 109.5,91.25 109.25,91.25 106.5,94 103.864,94 103.267,94.012 103.21,94 103.25,97.75 103.286,101.115 103.25,101.461 103.25,102.25 109,108 109,112.25 111,113.5 112.75,112.25 112.75,107.75 113,107.75 114.75,106 127,106
  region net GND: 128.004,115 132,115 132,124 22.5,124 22.5,46.5 62.5,46.5 62.5,66.5 40.5,66.5 38.4,64.4 38.4,53.6 38.5,53.5 36,51 36,50.5 30.5,50.5 29,52 29,61.5 24,66.5 23.5,66.5 23.5,117.9 26.4,120.8 39.4,120.8 40.2,120 40.5,120 40.5,118.07 40.43,118 40.67,117.76 45.76,117.76 50,122 126,122 128.016,119.984
  region net GND: 72.5,33 72.5,43.5 61.5,54.5 61,54.5 61,47.5 62,46.5 64,46.5 70,40.5 70,25 73,25 73,30.5
  text "HHO DRIVE V1.0" at 63.7,42.4 h3
  text "BRASILIA" at 63.7,36.95 h3
  text "24/04/2015" at 63.7,31.5 h3

## Silkscreen, mask and mechanical layers (free items; w line width, h text height)
Mechanical 1:
  lines w0.254: 22.5,128.246 22.5,128.754 ; 24.024,127.992 22.5,128.5 ; 24.024,129.008 22.5,128.5 ; 70.115,128.5 22.5,128.5 ; 84.385,128.5 132,128.5 ; 130.476,127.992 132,128.5 ; 130.476,129.008 132,128.5 ; 132,128.246 132,128.754 ; 22.5,25 132,25 132,124 25,124 22.6,124 22.5,123.9 22.5,120 22.5,25
  text "109.5 (mm)" at 70.369,127.586 h1.52

## Text inside footprints (layer, text, board x,y; h text height)
Q1: Top Overlay "2" at 113,54.8 h1 r180; Top Overlay "1" at 118.4,54.8 h1 r180; Top Overlay "3" at 107.6,54.8 h1 r180
T1: Top Overlay "e" at 118.85,67.5 h1 r270; Top Overlay "b" at 117.525,68.875 h1 r270; Top Overlay "c" at 116.5,67.5 h1 r270
T2: Top Overlay "e" at 107.15,63.5 h1 r90; Top Overlay "b" at 108.475,62.125 h1 r90; Top Overlay "c" at 109.5,63.5 h1 r90
T3: Top Overlay "e" at 118.85,59.5 h1 r270; Top Overlay "b" at 117.525,60.875 h1 r270; Top Overlay "c" at 116.5,59.5 h1 r270
T4: Top Overlay "e" at 107.15,71.5 h1 r90; Top Overlay "b" at 108.475,70.125 h1 r90; Top Overlay "c" at 109.5,71.5 h1 r90
U2: Top Overlay "3" at 71.825,118.04 h1.5 r90; Top Overlay "1" at 71.825,113.21 h1.5 r90; Top Overlay "2" at 71.825,115.5 h1.5 r90